# Altium PCB E-Stop.PcbDoc
Units mm, origin at the board's own origin, x right, y up, seen from the top; angles counter-clockwise.
Board outline 47.88 x 59.44 mm, 2 copper layers (Top Layer, Bottom Layer); 30 components, 22 nets, 103 pads, 12 vias.
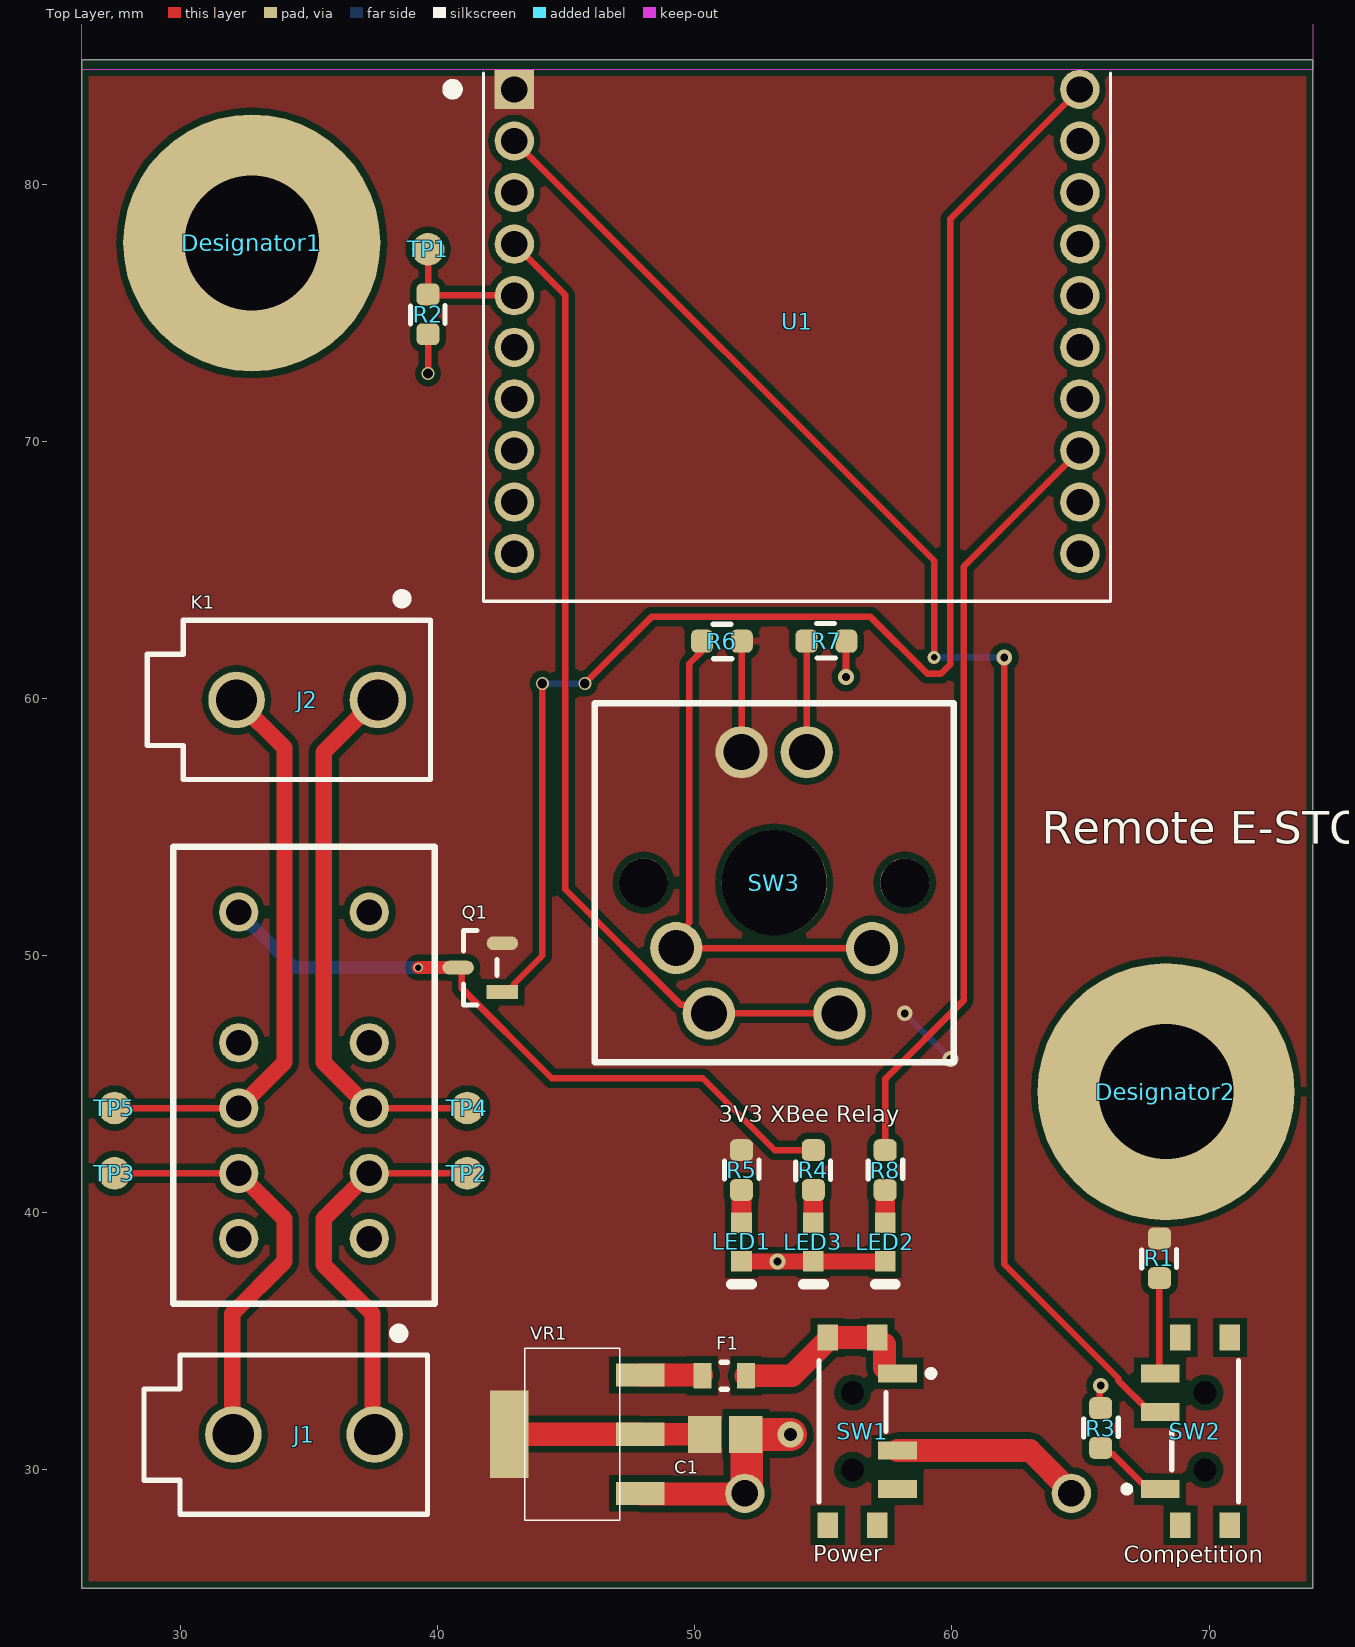
[diagram p0: Top Layer view]
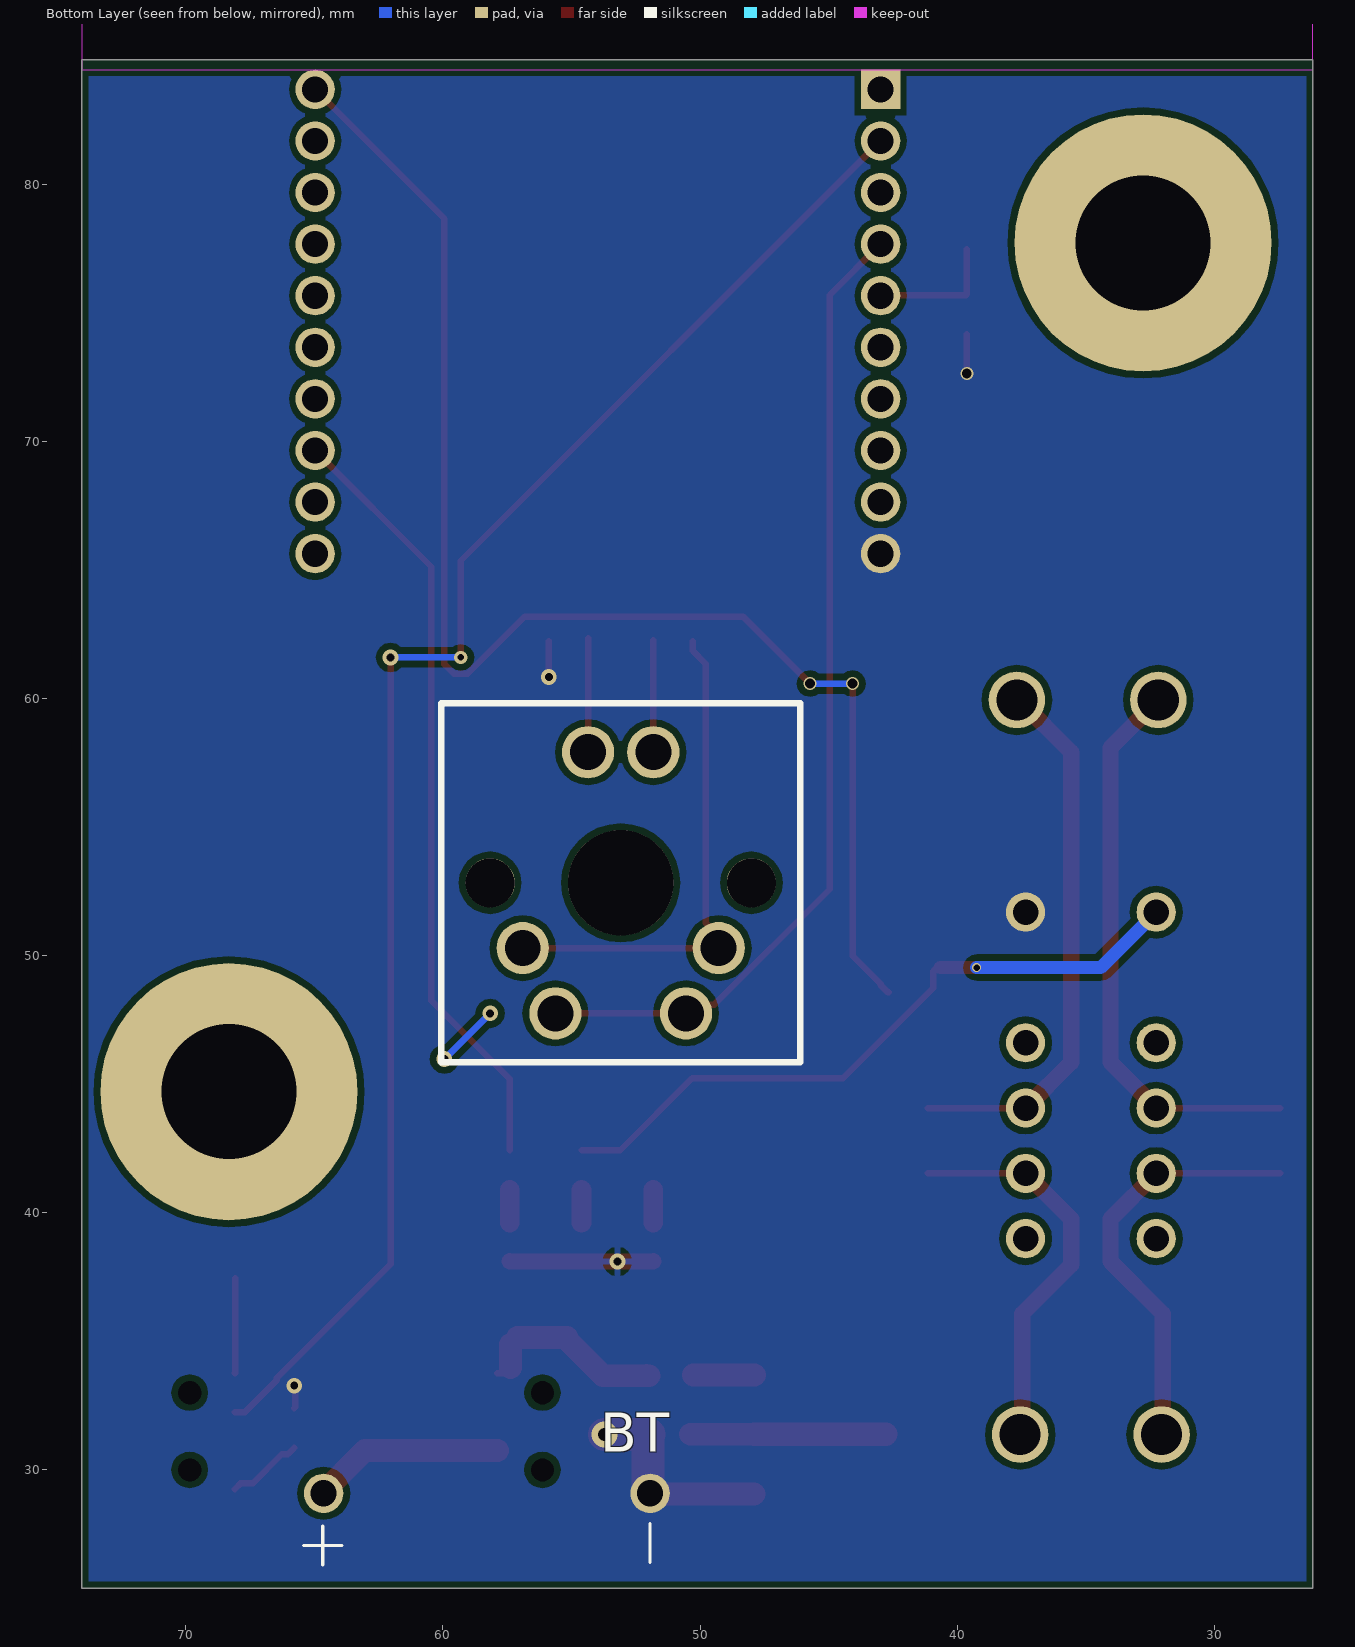
[diagram p1: Bottom Layer view, seen from below]

## Layer stack, top to bottom
Top Solder: solder mask 0.0102, Solder Resist, Dk 3.5
Top Layer: signal copper 0.0356
Dielectric 1: dielectric 0.32, FR-4, Dk 4.8
Bottom Layer: signal copper 0.0356
Bottom Solder: solder mask 0.0102, Solder Resist, Dk 3.5

## Board outline
26.162,25.4 74.041,25.4 74.041,84.836 26.162,84.836

## Design rules (kind name [scope] priority, off if disabled: settings)
BoardOutlineClearance [All] p1: gap=0.254 ignorepadtopadclearanceinfootprint=FALSE
Clearance [All] p1: gap=0.254 ignorepadtopadclearanceinfootprint=FALSE except(0: Arc-Hole Track-Hole SMDPad-Hole THPad-Hole Via-Hole Fill-Hole Poly-Hole Region-Hole Text-Hole)
ComponentClearance Keepout-allowance [InComponent('U1') vs InComponent('U1')] p1: gap=0 collisioncheckmode=3 verticalgap=0 showdistances=FALSE // Allows keepout layer to exist
ComponentClearance [All] p2: gap=0.127 collisioncheckmode=3 verticalgap=0.127 showdistances=TRUE
HoleSize [All] p1: absolutevalues=TRUE maxlimit=5.08 minlimit=0.025 maxpercent=80.000 minpercent=20.000
PolygonConnect [All] p1: connectstyle=Relief reliefconductorwidth=0.254 reliefentries=4 polygonreliefangle="90 Angle" airgapwidth=0.254
RoutingVias [All] p1: holewidth=0.711 width=1.27 viastyle="Through Hole" minholewidth=0.711 minwidth=1.27 maxholewidth=0.711 maxwidth=1.27
SilkToSilkClearance [All] p1: silktosilkclearance=0.127
SilkToSolderMaskClearance [IsPad] p1: minsilkscreentomaskgap=0.127 clearancetoexposedcopper=TRUE
SolderMaskExpansion [All] p1: expansion=0.102 istentingtop=FALSE
Width "Schematic Width Constraint_1" [InComponent('C1')] p1: maxlimit=0.381 minlimit=0.381 preferedwidth=0.381 minimp=50.000000 maximp=50.000000 favimp=50.000000
Width "Schematic Width Constraint" [InComponent('K1')] p2: maxlimit=0.254 minlimit=0.254 preferedwidth=0.254
Width [All] p3: maxlimit=2.032 minlimit=0.254 preferedwidth=0.254 minimp=50.000000 maximp=50.000000 favimp=50.000000
26 further rules are at their usual default settings.

## Classes and differential pairs
component class Xbee: LED2 R1 R2 R3 R6 R7 R8 SW2 SW3 TP1
component class VoltageRegulator: BT C1 F1 LED1 R5 SW1 VR1
component class Relay: J1 J2 K1 LED3 Q1 R4 TP2 TP3 TP4 TP5

## Components (designator, comment, footprint, x,y, rotation, side; value= is the part's Value field where it differs from the comment)
BT "BA3AAPC" "BAT_BA3AAPC  Slimmed down" 50.723,55.903 r90 bottom
C1 "4700 pF" "4700uF 0805" 51.181,31.369 r180 top
Designator1 "Comment" M5_Screw_Hole 32.766,77.724 r0 top
Designator2 "Comment" M5_Screw_Hole 68.326,44.704 r0 top
F1 "MF-FSMF050X-2" FP-MF-FSMF-MFG 51.142,33.655 r0 top value=0.1-0.8Ω
J1 "Key_Switch" MOLEX_0039293026 34.798,31.369 r180 top
J2 "Key_Switch" MOLEX_0039293026 34.925,59.944 r180 top
K1 "Relay - DPDT" TXS2-L-6V 29.718,54.229 r270 top
LED1 "HSMS-C190" AVAG-HSMX-C190_V 51.816,38.862 r270 top
LED2 "HSMS-C190" AVAG-HSMX-C190_V 57.404,38.862 r270 top
LED3 "HSMG-C190" AVAG-HSMX-C190_V 54.61,38.862 r270 top
Q1 "NDS0605" FP-318-08-IPC_C 41.656,49.53 r180 top
R1 "Res3" RESC1608X06N_0603 68.072,38.227 r90 top value=5K
R2 "Res3" RESC1608X06N_0603 39.624,74.943 r90 top value=5K
R3 "Res3" RESC1608X06N_0603 65.786,31.623 r270 top value=5K
R4 "Res3" RESC1608X06N_0603 54.61,41.656 r90 top value=110
R5 "Res3" RESC1608X06N_0603 51.816,41.656 r270 top value=110
R6 "Res3" RESC1608X06N_0603 51.054,62.23 r180 top value=2K
R7 "Res3" RESC1608X06N_0603 55.118,62.23 r0 top value=500
R8 "Res3" RESC1608X06N_0603 57.404,41.656 r270 top value=110
SW1 "PCM12SMTR" CKCP-PCM12SMTR_V 56.134,31.496 r270 top
SW2 "PCM12SMTR" CKCP-PCM12SMTR_V 69.85,31.496 r90 top
SW3 "Cherry MX" "Cherry MX" 46.126,45.882 r0 top
TP1 "TestPt" 50_MIL_PAD 39.624,77.47 r90 top
TP2 "TestPt" 50_MIL_PAD 41.148,41.529 r90 top
TP3 "TestPt" 50_MIL_PAD 27.432,41.529 r90 top
TP4 "TestPt" 50_MIL_PAD 41.148,44.069 r90 top
TP5 "TestPt" 50_MIL_PAD 27.432,44.069 r90 top
U1 "XB3-24Z8PT-J" XCVR_XB3-24Z8PT-J 53.975,77.597 r0 top
VR1 "AP2114H-3.3TRG1" AP2114 47.079,28.033 r90 top

## Footprints (in the part's own frame and the unit in brackets; to place one, negate y for a bottom-side part, rotate by r counter-clockwise, add the part's x,y. Pads: shape width x height; smd on the part's side, far side on the other; paste and mask are expansions set on the pad)
50_MIL_PAD [mm]
  round 1.27 smd: 1(0,0)
"4700uF 0805" [mm] "Chip Capacitor, 2-Leads, Body 2,00x1,25mm, IPC Medium Density"
  rect 1.3x1.45 smd: 1(-0.8,0) 2(0.8,0)
  body extent -1.1,-0.72 1.1,0.72, height 0.88
AP2114 [mm] "Generic SOT-223"
  rect 0.9x1.9 smd: 1(1.05,-0.8) 2(3.35,-0.8) 3(5.65,-0.8)
  rect 3.4x1.5 smd: 4(3.35,4.3)
  Top Layer lines w0.9: 3.35,4.3 3.35,-0.8
  silkscreen extent 0,0 6.7,3.7
AVAG-HSMX-C190_V [mm] "SMD, 2-Leads, Body 1.6x0.8mm, Height 0.9mm"
  rect 0.8x0.8 smd: 1(-0.75,0) 2(0.75,0)
  silkscreen extent 1.65,-0.4 1.65,0.4, body extent -0.8,-0.4 0.8,0.4, height 0.9
"BAT_BA3AAPC  Slimmed down" [mm] "Battery Holder for 3 AA cells in Series"
  round 1.53 hole 1.02: NEG(-26.82,1.22) POS(-26.82,13.92)
  silkscreen extent -29.6,1.22 -28,14.7
"Cherry MX" [mil]
  round 80 hole 55: 1(224.02,473.62) 2(324.02,473.62) 3(374.02,73.62) 4(174.02,73.62) 5(424.02,173.62) 6(124.02,173.62)
  round 75 hole 75 unplated: ""(74.02,273.62) ""(474.02,273.62)
  round 161 hole 161 unplated: ""(274.02,273.62)
  silkscreen extent -1,-1 549,549
CKCP-PCM12SMTR_V [mm] "SMD, 3-Leads, Body 6.7x2.6mm"
  rect 0.7x1.5 smd: 1(-2.25,1.75) 2(0.75,1.75) 3(2.25,1.75)
  round 0.6 hole 0.9 unplated: MH1(-1.5,0) MH2(1.5,0)
  rect 1x0.8 smd: MP1(-3.65,0.965) MP2(3.65,0.965) MP3(-3.65,-0.965) MP4(3.65,-0.965)
  silkscreen extent -2.75,-1.3 2.75,3.17, body extent -3.68,-2.34 3.67,2.23, height 1.4
FP-318-08-IPC_C [mm]
  rect 1.224x0.538 smd paste+0 mask+0: 1(-0.86,0.95)
  rrect100% 1.224x0.538 smd paste+0 mask+0: 2(-0.86,-0.95) 3(0.86,0)
  silkscreen extent -0.65,-1.45 0.65,1.45, body extent -1.57,-1.55 1.57,1.55, height 0.25
FP-MF-FSMF-MFG [mm]
  rect 0.7x1 smd paste+0 mask+0: 1(-0.85,0) 2(0.85,0)
  silkscreen extent -0.13,-0.53 0.13,0.53, body extent -1.3,-0.63 1.3,0.63, height 0.25
M5_Screw_Hole [mm]
  round 10 hole 5.25 mask+0.2: 1(0,0)
MOLEX_0039293026 [mm]
  round 2.2 hole 1.6: 1(-2.75,0) 2(2.75,0)
  silkscreen extent -4.8,-4.06 6.22,3.1, body extent -4.8,-3.1 6.2,3.1, height 12.8
RESC1608X06N_0603 [mm] "Chip Resistor, 2-Leads, Body 1.60x0.80mm, IPC Medium Density"
  rrect50% 0.85x0.9 smd: 1(-0.775,0) 2(0.775,0)
  silkscreen extent -0.38,-0.66 0.34,0.69, body extent -0.85,-0.45 0.85,0.45, height 0.55
TXS2-L-6V [mil]
  round 60 hole 39: 1(100,100) 3(300,100) 4(400,100) 5(500,100) 6(600,100) 7(600,300) 8(500,300) 9(400,300) 10(300,300) 12(100,300)
  silkscreen extent 0,0 700,400
XCVR_XB3-24Z8PT-J [mm]
  rect 1.53x1.53 hole 1.02: 1(-10.998,6.096)
  round 1.53 hole 1.02: 2(-10.998,4.089) 3(-10.998,2.083) 4(-10.998,0.076) 5(-10.998,-1.93) 6(-10.998,-3.937) 7(-10.998,-5.944) 8(-10.998,-7.95) 9(-10.998,-9.957) 10(-10.998,-11.963) 11(10.998,-11.963) 12(10.998,-9.957) 13(10.998,-7.95) 14(10.998,-5.944) 15(10.998,-3.937) 16(10.998,-1.93) 17(10.998,0.076) 18(10.998,2.083) 19(10.998,4.089) 20(10.998,6.096)
  Keep-Out Layer region: 20.066,6.86 -27.813,6.86 -27.813,13.335 20.066,13.335
  Keep-Out Layer region: 20.066,6.86 -27.813,6.86 -27.813,13.335 20.066,13.335
  silkscreen extent -13.6,-13.82 12.19,6.73

## Part data
BT: "Battery Holder _Open_ AA 3 Cell PC Pin", Package=None, Digi-Key_Part_Number=BA3AAPC-ND, Digi-Key_Purchase_URL=https://www.digikey.com/product-detail/en/mpd-memory-protection-devices/BA3AAPC/BA3AAPC-ND/2439223?utm_source=snapeda&utm_medium=aggregator&utm_campaign=symbol, MF="MPD _Memory Protection Devices_", MP=BA3AAPC, SnapEDA_Link=https://www.snapeda.com/parts/BA3AAPC/MPD%20%28Memory%20Protection%20Devices%29/view-part/3213839/?ref=snap
C1: library part "4700pF 0805", "KEMET - C0805C472K5RACTU - CERAMIC CAPACITOR 4700PF, 50V, X7R, 10%, 0805", Capacitance=4.7nF, Case Code (Imperial)=0805, Case Code (Metric)=2012, Dielectric=X7R, Dielectric Material=Ceramic, Manufacturer 1=KEMET, Manufacturer Part Number 1=C0805C472K5RACTU, Max Operating Temperature=125°C, Min Operating Temperature=-55°C, Package Quantity=1, Supplier Part Number 1=399-1155-1-ND, Tolerance=10%, Voltage=50V, Case/Package=0805, ComponentLink1Description=https://datasheet.ciiva.com/6074/kem-c1002-x7r-smd-6074679.pdf?src-supplier=Farnell, ComponentLink1URL=https://datasheet.ciiva.com/6074/kem-c1002-x7r-smd-6074679.pdf?src-supplier=Farnell, ComponentLink2Description=https://datasheet.ciiva.com/28682/1851736-28682318.pdf?src-supplier=Element14, ComponentLink2URL=https://datasheet.ciiva.com/28682/1851736-28682318.pdf?src-supplier=Element14, Contact Plating=Tin,Matte, Depth=1.25mm, Height=0.78mm, Length=2mm, Mount="Surface Mount", Number of Pins=2, Packaging="Tape and Reel", Pricing 1="1=0,10000, 10=0,06800, 100=0,03040, 500=0,02172, 1000=0,01706 (USD)", Radiation Hardening=No, REACH SVHC="No SVHC", RoHS=Yes, Rule="Width Constraint [Pref Width = 15mil    Min Width = 15mil    Max Width = 15mil]", Stock 1=374666, Supplier 1=Digi-Key, Termination=SMD/SMT, Thickness=0.035inch, Voltage Rating=50V, Voltage Rating (DC)=50V, Weight=0.000194oz, Width=0.049inch
F1: library part CMP-07400-000010-1, "PTC RESET FUSE 6V 500MA 0603", Ambient Temperature Range High=+85°C, Ambient Temperature Range Low=-40°C, Current Rating=40A, Hold Current=0.5A, Manufacturer="Bourns Inc.", Package=MF-FSMF, Resistance=0.1-0.8Ω, Temperature="-40°C to +85°C", Trip Current=1A, Voltage Rating=6V, Automotive=No, Category=Fuse, ComponentLink2Description=Datasheet, ComponentLink2URL=https://www.bourns.com/docs/Product-Datasheets/mffsmf.pdf, Device Class L1="Circuit Protection", Device Class L2="PTC Resettable Fuses", Device Class L3=unset, Digikey Description="PTC RESET FUSE 6V 500MA 0603", Height=1mm, Lead Free=Yes, Manufacturer Part Number=MF-FSMF050X-2, Mouser Description="Resettable Fuses - PPTC 6volts 40amps", Octopart=https://octopart.com/mf-fsmf050x-2-bourns-10470804, RoHS=TRUE, Temperature Range High=+85°C, Temperature Range Low=-40°C, Trip Time=0.1s
K1: library part Relay_2A_TXS2-L-3V, Rule="Width Constraint [Pref Width = 10mil    Min Width = 10mil    Max Width = 10mil]"
LED1 LED2: library part CMP-2000-06427-1, "LED Uni-Color Red, 52 mW, 20 mA, -40 to 85 degC, 2-Pin SMD, RoHS, Tape and Reel", Emitting Color=Red, Forward Current=25mA, Forward Voltage=2.6V, Manufacturer=Avago, Operating Temp Range=-40Cto85C, Operating Temperature Classification=Industrial, Package Description="2-Pin Surface Mount Device, Body 1.6 x 0.8 mm, Height 0.9 mm", Package Reference=HSMX-C190, Package Type=ChipLed, Power Dissipation=52W, Reverse Voltage=5V, Test Current (It)=20mA, Chip Material=GaP, Datasheet URL=http://docs.avagotech.com/docs/AV02-0551EN, Datasheet Version=03/2012, DELETED=Compliant, Dominant Wave Length=626nm, High Brightness=No, Lens Dimensions=1x0.8x0.5mm, Lens Type=ColorlessDiffused, Lum Intensity=10mcd, Luminous Intensity=10mcd, Main Category=ChipLED, Manufacturer URL=http://www.avagotech.com/, Mounting=SurfaceMount, Mounting Technology=SurfaceMount, Number of  Elements=1, Packaging=TapeandReel, Peak Wavelength=630nm, Pin Count=2, Product Depth (mm)=0.8mm, Product Height (mm)=0.8mm, Product Length (mm)=1.6mm, Rad Hardened=No, Shape Type=Rectangular, Type=Uni-Color, Viewing Angle=170deg
LED3: library part CMP-1744-00002-1, "Chip LED, Green, 2.2 V, -40 to 85 degC, 2-Pin SMD, RoHS, Tape and Reel", Case\Package=SOIC, Clock Frequency="100 KHz", Frequency="400 KHz", Max Operating Temperature="85 degC", Max Supply Voltage="5.5 V", Min Operating Temperature="-40 degC", Min Supply Voltage="1.7 V", Nominal Supply Current="2 mA", Package Quantity=3000, Access Time="3500 ns", ComponentLink1Description="Manufacturer URL", ComponentLink1URL=http://www.avagotech.com/, ComponentLink2Description=Datasheet, ComponentLink2URL=http://docs.avagotech.com/docs/AV02-0551EN, ComponentLink3Description="Package Specification", ComponentLink3URL=http://www.fairchildsemi.com/dwg/MA/MA03D.pdf, DatasheetVersion=Mar-12, Density="32 kb", Height="1.5 mm", Interface=Serial, Length="5 mm", Max Clock Frequency="100 KHz", Mount="Surface Mount", PackageDescription="2-Pin Surface Mount Device, Body 1.6 x 0.8 mm, Height 0.9 mm", PackageReference=HSMX-C190, Packaging="Tape and Reel", Pins=8, Radiation Hardening=No, REACH SVHC="No SVHC", RoHSCompliant=true, Width="4 mm"
Q1: library part CMP-07173-000122-1, "MOSFET P-CH 60V 180MA SOT-23", Case/Package=SOT-23, Continuous Drain Current (ID)=180mA, Current Rating=-180mA, Drain to Source Breakdown Voltage=-60V, Drain to Source Resistance=5R, Drain to Source Voltage (Vdss)=60V, Gate to Source Voltage (Vgs)=20V, Input Capacitance=79pF, Max Operating Temperature=150°C, Max Power Dissipation=360mW, Min Operating Temperature=-55°C, Package Quantity=3000, Threshold Voltage=-1.7V, Contact Plating=Tin, Dual Supply Voltage=-60V, Element Configuration=Single, Fall Time=6.3ns, Height=0.93mm, Lead Free="Lead Free", Length=2.92mm, Mount="Surface Mount", Nominal Vgs=-1.7V, Number of Elements=1, Number of Pins=3, On-State Resistance=5R, Packaging="Tape and Reel", Power Dissipation=360mW, Radiation Hardening=No, Rds On Max=5R, REACH SVHC="No SVHC", Rise Time=6.3ns, Turn-Off Delay Time=10ns, Turn-On Delay Time=2.5ns, Voltage Rating (DC)=-60V, Weight=0.03g, Width=3.05mm
R1 R2 R3 R4 R5 R6 R7 R8: "Resistor", LatestRevisionDate=29-May-2009, LatestRevisionNote="IPC-7351 Footprint Added.", PackageDescription="Chip Resistor", PackageReference=J1-0603, Published=8-Jun-2000, Publisher="Altium Limited"
SW1 SW2: library part CMP-2000-06884-1, "Ultraminiature Slide Switch, SPDT, 0.3 A, 6 V, -20 to 85 degC, 3-Pin SMD, RoHS, Tape and Reel", Contact Current-Max=0.3A, Manufacturer="C&K Components", Package Description="3-Pin Surface Mount Device, Body 6.7 x 2.6 mm", Circuitry=SPDT, Contact Material=SilverOverCopper, Datasheet URL=http://www.ck-components.com/media/1424/pcm.pdf, Datasheet Version=02/2016, Manufacturer URL=http://www.ckswitches.com/, Mounting Technology=SurfaceMount, Package Reference=PCM12SMTR, Switch Operation=On-On, Termination Style=RightAngle/SurfaceMount
SW3: "Mechanical Switch with LED / https://media.digikey.com/pdf/Data%20Sheets/Cherry%20PDFs/MX%20Series.pdf"
U1: "802.15.4 ZigbeeÂ® Transceiver Module 2.4GHz Integrated, Trace Through Hole / https://www.digi.com/resources/documentation/digidocs/pdfs/90001543.pdf", Package="Module Digi International", Digi-Key_Part_Number=602-2188-ND, Digi-Key_Purchase_URL=https://www.digikey.ch/product-detail/en/digi/XB3-24Z8PT-J/602-2188-ND/8130934?utm_source=snapeda&utm_medium=aggregator&utm_campaign=symbol, MF="Digi International", MP=XB3-24Z8PT-J, SnapEDA_Link=https://www.snapeda.com/parts/XB3-24Z8PT-J/Digi%20International/view-part/2751315/?ref=snap
J1 J2: LatestRevisionDate=17-Jul-2002, LatestRevisionNote="Re-released for DXP Platform.", PackageDescription="Switch; 2 Leads", PackageReference=SPST-2, Published=24-Mar-1999, Publisher="Altium Limited"

## Via types
v1: diameter 0.61, hole 0.305, Top Layer to Bottom Layer, tented both sides, 5 vias
v2: diameter 0.508, hole 0.381, Top Layer to Bottom Layer, 3 vias
v3: diameter 0.356, hole 0.254, Top Layer to Bottom Layer, 1 vias
v4: diameter 0.61, hole 0.305, Top Layer to Bottom Layer, 1 vias
v5: diameter 1.016, hole 0.508, Top Layer to Bottom Layer, 1 vias
v6: diameter 0.508, hole 0.254, Top Layer to Bottom Layer, tented both sides, 1 vias

## Nets (pads, with @x,y where several pads share a name; then routed paths per layer and width w, separated by ;. In a path a pad name is that pad's centre, name@x,y a point inside that pad or via, vN(x,y) a via of type N, cw(c..) or ccw(c..) an arc to the next point about the centre after c; other vN are vias at no path point)
3V3_REG: C1.2 Q1.2 R1.2 R5.1 R6.1 SW3.1 U1.1 VR1.2 VR1.4 | length 9.4
  Top Layer w0.254: C1.2@50.367,31.383 C1.2 ; SW3.1 R6.1@51.816,62.255
  Top Layer w0.889: VR1.2 C1.2@50.367,31.383
  Bottom Layer w0.254: v1(58.166,47.752) v1(59.944,45.974)
GND: BT.NEG C1.1 K1.12 LED1.2 LED2.2 LED3.2 R2.1 R3.1 R7.2 U1.10 VR1.1 | length 17.7
  Top Layer w0.254: v2(39.624,72.644) R2.1 ; VR1.1 VR1.1@47.902,29.06 ; C1.1 C1.1@52.024,31.326 ; v4(55.88,60.833) 55.88,62.217 R7.2 ; R3.1 65.751,32.433 65.751,33.239 v1(65.786,33.274)
  Top Layer w0.635: LED1.2 51.828,38.1 v1(53.213,38.1) 57.392,38.1 LED2.2
  Top Layer w0.889: VR1.1@47.902,29.06 BT.NEG@52.024,29.06
  Top Layer w1.27: C1.1 v5(53.721,31.369) ; BT.NEG@52.024,29.06 C1.1@52.024,31.326
NetF1_1: F1.1 VR1.3 | length 2.4
  Top Layer w0.254: F1.1@50.264,33.683 F1.1
  Top Layer w0.889: VR1.3 F1.1@50.264,33.683
NetF1_2: F1.2 SW1.1 SW1.MP1 SW1.MP3 | length 7.9
  Top Layer w0.254: SW1.MP3@55.169,35.046 SW1.MP3 ; SW1.MP1 SW1.MP1@57.372,34.873 ; SW1.1@57.372,33.969 57.595,33.746 SW1.1
  Top Layer w0.508: F1.2 51.992,33.768 F1.2@52.088,33.864
  Top Layer w0.889: F1.2 53.778,33.655 SW1.MP3@55.169,35.046 ; SW1.MP3 SW1.MP1 ; SW1.1@57.372,33.969 SW1.MP1@57.372,34.873
NetJ1_1: J1.1 K1.8 TP2.1 | length 15.5
  Top Layer w0.254: K1.8 TP2.1
  Top Layer w0.635: K1.8 35.56,39.751 35.56,37.973 37.465,36.068 37.465,31.452 J1.1
NetJ1_2: J1.2 K1.5 TP3.1 | length 16.6
  Top Layer w0.254: TP3.1 K1.5
  Top Layer w0.635: J1.2 32.004,31.413 32.004,36.068 34.036,38.1 34.036,39.751 K1.5
NetJ2_1: J2.1 K1.9 TP4.1 | length 21.3
  Top Layer w0.254: K1.9 TP4.1
  Top Layer w0.635: K1.9 35.56,45.847 35.56,57.912 37.592,59.944 J2.1
NetJ2_2: J2.2 K1.4 TP5.1 | length 22.2
  Top Layer w0.254: TP5.1 K1.4@32.131,44.069
  Top Layer w0.635: K1.4@32.131,44.069 K1.4 34.036,45.847 34.036,58.083 J2.2
NetK1_1: K1.1 Q1.3 R4.2 | length 26.5
  Top Layer w0.254: Q1.3@40.706,49.53 Q1.3 40.927,49.399 40.927,48.735 44.435,45.227 50.31,45.227 53.105,42.431 R4.2
  Top Layer w0.508: v3(39.243,49.53) Q1.3@40.656,49.53
  Bottom Layer w0.508: K1.1 34.417,49.53 v3(39.243,49.53)
NetLED1_1: LED1.1 R5.2 | length 1.3
  Top Layer w0.762: LED1.1 R5.2
NetLED2_1: LED2.1 R8.2 | length 1.3
  Top Layer w0.762: LED2.1 R8.2
NetLED3_1: LED3.1 R4.1 | length 1.3
  Top Layer w0.762: LED3.1 R4.1
NetQ1_1: Q1.1 U1.20 | length 55.1
  Top Layer w0.254: Q1.1@42.656,48.58 42.706,48.58 42.979,48.853 42.979,48.903 44.069,49.993 v2(44.069,60.579) ; v2(45.72,60.579) 48.329,63.188 56.818,63.188 59.046,60.96 59.572,60.96 59.944,61.332 59.944,78.664 U1.20
  Bottom Layer w0.254: v2(44.069,60.579) v2(45.72,60.579)
NetR1_1: R1.1 SW2.3 | length 3.7
  Top Layer w0.254: R1.1 68.072,33.774 SW2.3
NetR2_2: R2.2 TP1.1 U1.5 | length 5.1
  Top Layer w0.254: TP1.1 R2.2 39.65,75.692 42.951,75.692 U1.5
NetR3_2: R3.2 SW2.1 | length 3
  Top Layer w0.254: R3.2 66.031,30.603 66.269,30.603 67.403,29.469 67.877,29.469 SW2.1
NetR6_2: R6.2 SW3.5 SW3.6 | length 19.9
  Top Layer w0.254: R6.2 50.279,61.849 49.784,61.354 49.784,51.281 49.616,51.113 49.616,50.46 49.784,50.292 SW3.5 SW3.5@57.404,50.292
NetR7_1: R7.1 SW3.2 | length 4.4
  Top Layer w0.254: SW3.2 R7.1@54.356,62.349
NetR8_1: R8.1 U1.13 | length 30.4
  Top Layer w0.254: R8.1 57.404,45.2 60.452,48.248 60.452,65.126 U1.13
NetSW2_2: SW2.2 U1.2 | length 61.7
  Top Layer w0.254: U1.2 59.309,65.354 v6(59.309,61.595) ; v1(62.038,61.595) 62.038,37.992 66.472,33.558 66.472,33.474 67.7,32.246 SW2.2
  Bottom Layer w0.254: v6(59.309,61.595) v1(62.038,61.595)
NetSW3_3: SW3.3 SW3.4 U1.4 | length 39.1
  Top Layer w0.254: U1.4 44.958,75.692 44.958,52.578 49.444,48.092 50.206,48.092 SW3.4 SW3.3@56.134,47.752
VCC: BT.POS SW1.2 | length 7.5
  Top Layer w0.889: SW1.2 63.038,30.746 BT.POS@64.724,29.06
pads on no net: Designator1.1 Designator2.1 K1.3 K1.6 K1.7 K1.10 SW1.3 SW1.MH1 SW1.MH2 SW1.MP2 SW1.MP4 SW2.MH1 SW2.MH2 SW2.MP1 SW2.MP2 SW2.MP3 SW2.MP4 SW3. U1.3 U1.6 U1.7 U1.8 U1.9 U1.11 U1.12 U1.14 U1.15 U1.16 U1.17 U1.18 U1.19

## Polygon pours and split planes (outlines as drawn)
GND on Bottom Layer "GND_L02_P001" (solid, pour order 1): 26.289,84.455 26.289,25.527 73.914,25.527 73.914,84.455
3V3_REG on Top Layer "3V3_REG_L01_P002" (solid, pour order 2): 26.287,85.595 26.414,25.527 73.914,25.527 73.787,84.455

## Silkscreen, mask and mechanical layers (free items; w line width, h text height)
Top Overlay:
  text "Remote E-STOP 2021" at 63.5,54.356 h1.27
  text "3V3 XBee Relay" at 50.927,43.519 h0.64
  text "Power" at 54.61,26.416 h0.64
  text "Competition" at 66.675,26.374 h0.64